# Altium PCB PCB1.PcbDoc
Units mil, origin at the board's own origin, x right, y up, seen from the top; angles counter-clockwise.
Board outline 1050 x 1650 mil, 2 copper layers (Top Layer, Bottom Layer); 30 components, 74 nets, 217 pads, 0 vias.
Unrouted connection lines stored in the file: 127.
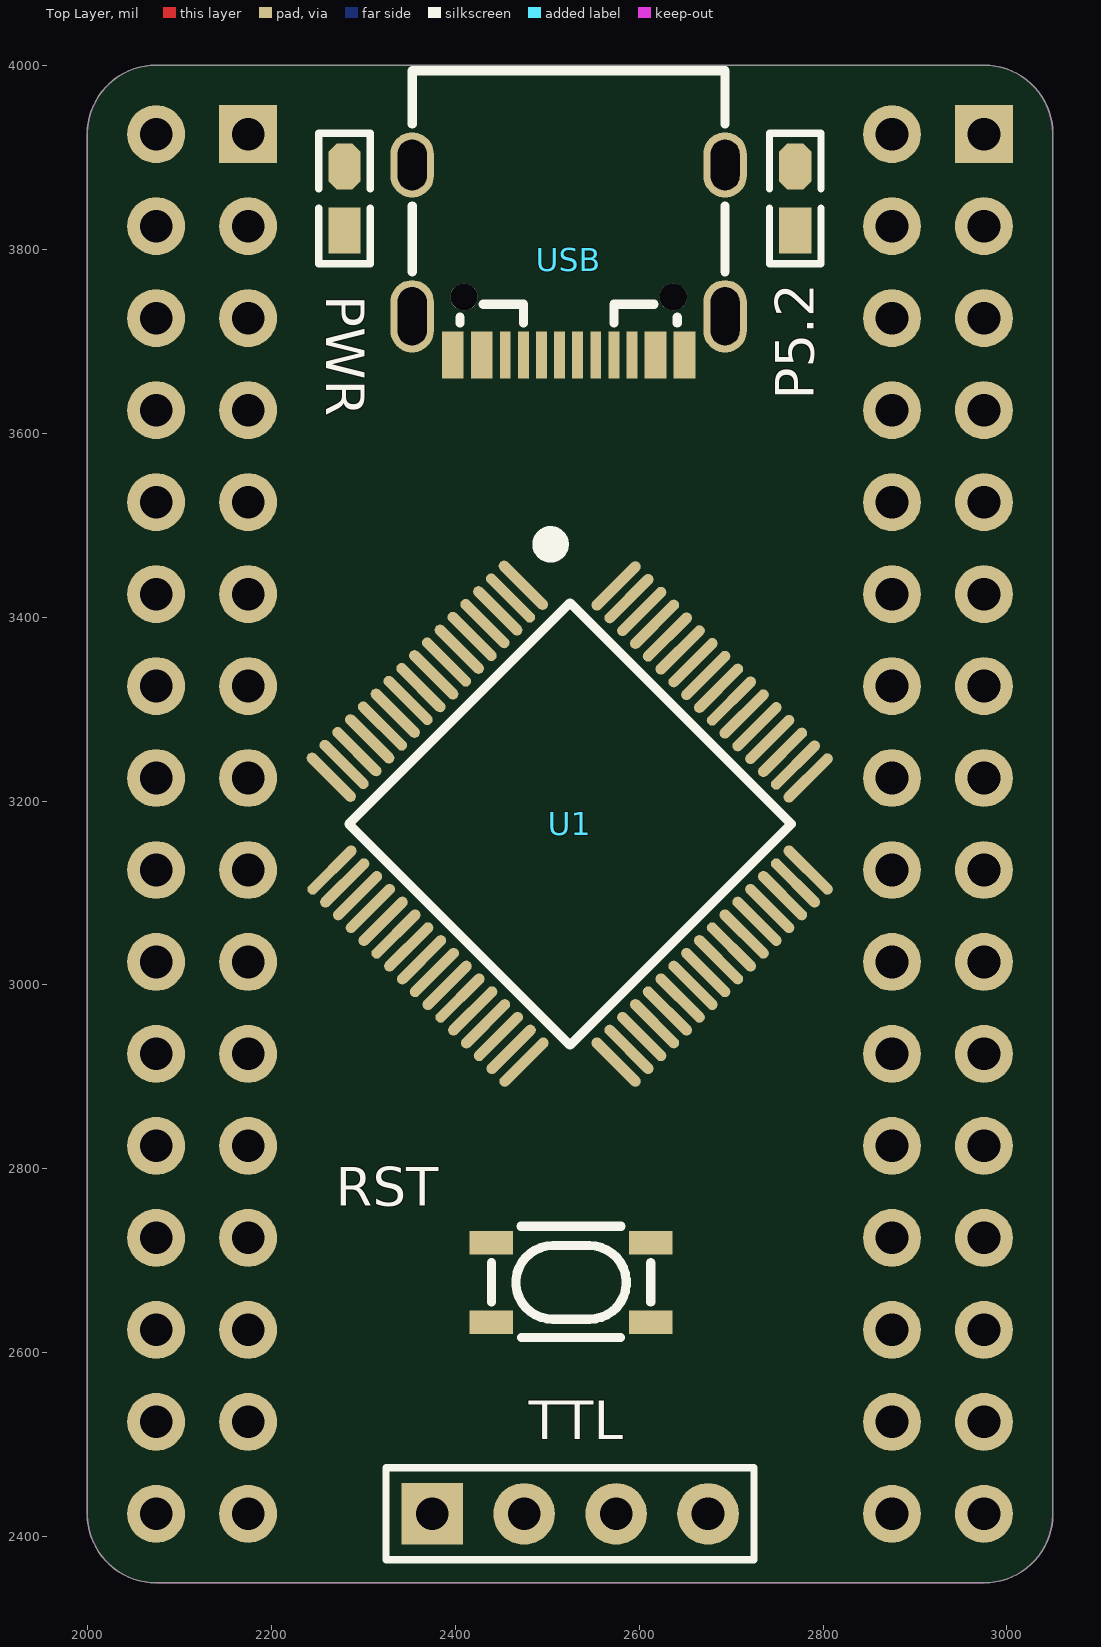
[diagram p0: Top Layer view]
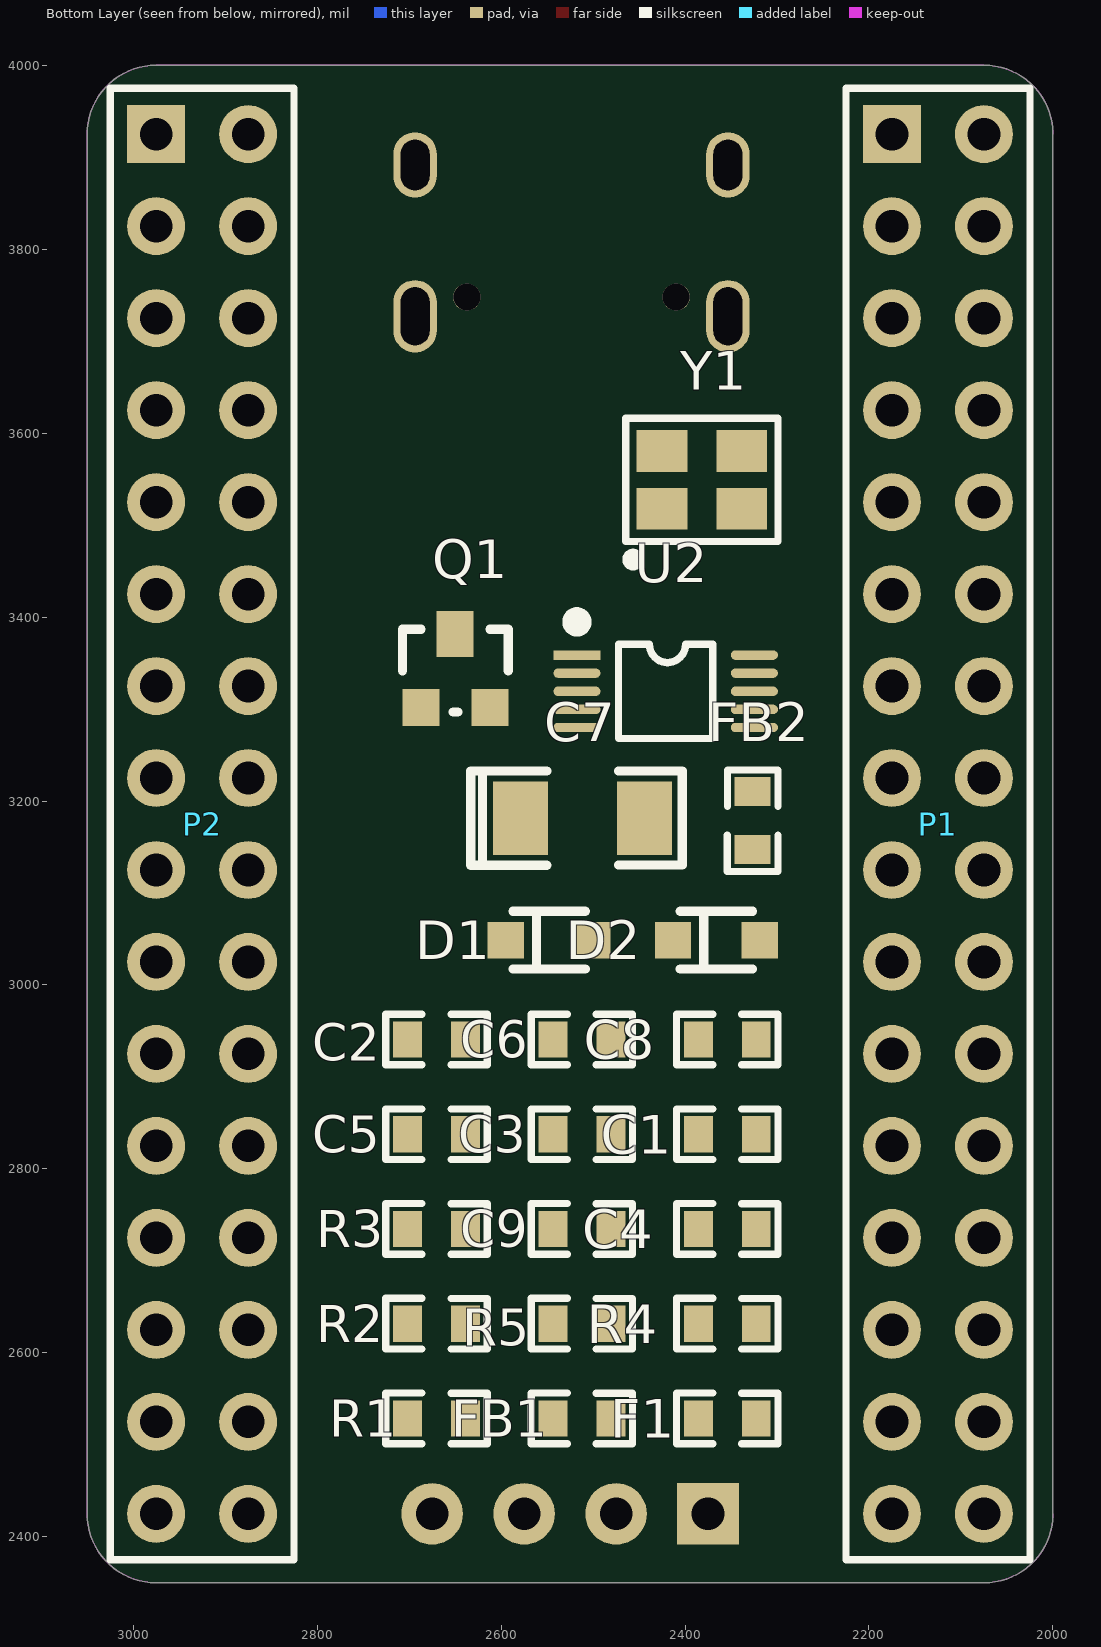
[diagram p1: Bottom Layer view, seen from below]

## Layer stack, top to bottom
Top Solder: solder mask 0.4, Solder Resist, Dk 3.5
Top Layer: signal copper 1.4
Dielectric 1: dielectric 12.6, FR-4, Dk 4.8
Bottom Layer: signal copper 1.4
Bottom Solder: solder mask 0.4, Solder Resist, Dk 3.5

## Board outline
2000,2425 2000,3925 cw(c2075,3925) 2075,4000 2975,4000 cw(c2975,3925) 3050,3925 3050,2425 cw(c2975,2425) 2975,2350 2075,2350 cw(c2075,2425)

## Design rules (kind name [scope] priority, off if disabled: settings)
Clearance [All] p1: gap=10 ignorepadtopadclearanceinfootprint=FALSE except(0: Arc-Hole Track-Hole SMDPad-Hole THPad-Hole Via-Hole Fill-Hole Poly-Hole Region-Hole Text-Hole)
ComponentClearance [All] p1: gap=20 collisioncheckmode=3 verticalgap=10 showdistances=FALSE
ComponentOrientations [All] p1: allowedrotations=27
PolygonConnect [All] p1: connectstyle=Relief reliefconductorwidth=10 reliefentries=4 polygonreliefangle="90 Angle" airgapwidth=10
RoomDefinition Sheet1 [InComponentClass('Sheet1')] p1: confinementstyle=ConfineIn formatcopy=TRUE lockcomponents=FALSE outline 0,0 2000,0 2000,1000 0,1000
RoutingVias [All] p1: holewidth=28 width=50 viastyle="Through Hole" minholewidth=28 minwidth=50 maxholewidth=28 maxwidth=50
SolderMaskExpansion [All] p1: expansion=4
Width [All] p1: maxlimit=10 minlimit=10 preferedwidth=10
29 further rules are at their usual default settings.

## Components (designator, comment, footprint, x,y, rotation, side; value= is the part's Value field where it differs from the comment)
C1 "100nF" 0603电容 2354.06,2837.71 r180 bottom
C2 "22pF" 0603电容 2670.28,2940.7 r180 bottom
C3 "22pF" 0603电容 2512.17,2837.71 r180 bottom
C4 "100nF" 0603电容 2354.06,2734.72 r180 bottom
C5 "10nF" 0603电容 2670.28,2837.71 r180 bottom
C6 "10nF" 0603电容 2512.17,2940.7 r180 bottom
C7 "16V   10uF" Tan1206 2449.03,2901.15 r180 bottom
C8 "22nF" 0603电容 2354.06,2940.7 r180 bottom
C9 "100nF" 0603电容 2512.17,2734.72 r180 bottom
D1 "1N5819" SOD-323 2517.12,2989.64 r180 bottom
D2 "5V稳压管" SOD-323 2335.26,2989.64 r180 bottom
F1 "350mA" 0603保险丝 2354.06,2528.74 r180 bottom
FB1 "0R" 0603磁珠 2512.17,2528.74 r180 bottom
FB2 "0R" 0603磁珠 2326.5,3178.6 r90 bottom
P1 "Header 16X2" HDR-16X2 2175,3925 r270 bottom locked
P2 "Header 16X2" HDR-16X2 2975,3925 r270 bottom locked
P5.2 "Blue_LED" "LED 0603B" 2770,3855 r90 top
PWR "Red_LED" "LED 0603R" 2280,3855 r90 top
Q1 "AO3401" SOT-23 2691.98,3301.02 r180 bottom
R1 "0R" 0603电阻 2670.28,2528.74 r180 bottom
R2 "10K" 0603电阻 2670.28,2631.73 r180 bottom
R3 "300R" 0603电阻 2670.28,2734.72 r180 bottom
R4 "4.7K" 0603电阻 2354.06,2631.73 r180 bottom
R5 "4.7K" 0603电阻 2512.17,2631.73 r180 bottom
RST "*" SWD 2525,2675 r180 top locked
TTL "Header 4" HDR-1X4 2375,2425 r0 top locked
U1 "STC8A8K64S4A12_LQFP64" LQFP64-10*10 2525,3175 r225 top locked
U2 "CH340E" MSOP-10 2421.05,3319.28 r270 bottom
USB "USB_TypeC" USB3.1 2510,3794 r180 top locked
Y1 "24MHz" XTAL-SMD3225 2382.45,3549.51 r180 bottom

## Footprints (in the part's own frame and the unit in brackets; to place one, negate y for a bottom-side part, rotate by r counter-clockwise, add the part's x,y. Pads: shape width x height; smd on the part's side, far side on the other; paste and mask are expansions set on the pad)
0603保险丝 [mm]
  rect 0.8x1 smd: 1(-0.8,0) 2(0.8,0)
  silkscreen extent -1.4,-0.7 1.4,0.7, body extent -0.8,-0.41 0.8,0.41, height 0.52
0603电容 [mm]
  rect 0.8x1 smd: 1(-0.8,0) 2(0.8,0)
  silkscreen extent -1.4,-0.7 1.4,0.7, body extent -0.8,-0.4 0.8,0.4, height 0.6
0603电阻 [mm]
  rect 0.8x1 smd: 1(-0.8,0) 2(0.8,0)
  silkscreen extent -1.4,-0.7 1.4,0.7, body extent -0.8,-0.4 0.8,0.4, height 0.45
0603磁珠 [mm]
  rect 0.8x1 smd: 1(-0.8,0) 2(0.8,0)
  silkscreen extent -1.4,-0.7 1.4,0.7, body extent -0.8,-0.4 0.8,0.4, height 0.8
HDR-1X4 [mm] "排针，4脚"
  rect 1.7x1.7 hole 0.9: 1(0,0)
  round 1.7 hole 0.9: 2(2.54,0) 3(5.08,0) 4(7.62,0)
  silkscreen extent -1.27,-1.27 8.89,1.27, body extent -1.27,-1.27 8.89,1.27, height 8.5
HDR-16X2 [mm] "双排排针，16x2脚"
  rect 1.6x1.6 hole 0.9: 1(0,0)
  round 1.6 hole 0.9: 2(0,2.54) 3(2.54,0) 4(2.54,2.54) 5(5.08,0) 6(5.08,2.54) 7(7.62,0) 8(7.62,2.54) 9(10.16,0) 10(10.16,2.54) 11(12.7,0) 12(12.7,2.54) 13(15.24,0) 14(15.24,2.54) 15(17.78,0) 16(17.78,2.54) 17(20.32,0) 18(20.32,2.54) 19(22.86,0) 20(22.86,2.54) 21(25.4,0) 22(25.4,2.54) 23(27.94,0) 24(27.94,2.54) 25(30.48,0) 26(30.48,2.54) 27(33.02,0) 28(33.02,2.54) 29(35.56,0) 30(35.56,2.54) 31(38.1,0) 32(38.1,2.54)
  silkscreen extent -1.27,-1.27 39.37,3.81, body extent -1.27,-1.27 39.37,3.81, height 8.5
"LED 0603B" [mil] "蓝色0603LED"
  rect 50x35 smd: 1(-35,0.26)
  oct 50x35 smd: 2(35,0.26)
  silkscreen extent -71,-28 71,28, body extent -31,-16 31,16, height 24
"LED 0603R" [mil] "红色0603LED"
  rect 50x35 smd: 1(-35,0.26)
  oct 50x35 smd: 2(35,0.26)
  silkscreen extent -71,-28 71,28, body extent -31,-16 31,16, height 24
LQFP64-10*10 [mm] "10x10mm，0.5mm"
  oval 0.3x1.8 smd: 1(-3.75,-5.575) 2(-3.25,-5.575) 3(-2.75,-5.575) 4(-2.25,-5.575) 5(-1.75,-5.575) 6(-1.25,-5.575) 7(-0.75,-5.575) 8(-0.25,-5.575) 9(0.25,-5.575) 10(0.75,-5.575) 11(1.25,-5.575) 12(1.75,-5.575) 13(2.25,-5.575) 14(2.75,-5.575) 15(3.25,-5.575) 16(3.75,-5.575) 33(3.75,5.55) 34(3.25,5.55) 35(2.75,5.55) 36(2.25,5.55) 37(1.75,5.55) 38(1.25,5.55) 39(0.75,5.55) 40(0.25,5.55) 41(-0.25,5.55) 42(-0.75,5.55) 43(-1.25,5.55) 44(-1.75,5.55) 45(-2.25,5.55) 46(-2.75,5.55) 47(-3.25,5.55) 48(-3.75,5.55)
  oval 1.8x0.3 smd: 17(5.55,-3.75) 18(5.55,-3.25) 19(5.55,-2.75) 20(5.55,-2.25) 21(5.55,-1.75) 22(5.55,-1.25) 23(5.55,-0.75) 24(5.55,-0.25) 25(5.55,0.25) 26(5.55,0.75) 27(5.55,1.25) 28(5.55,1.75) 29(5.55,2.25) 30(5.55,2.75) 31(5.55,3.25) 32(5.55,3.75) 49(-5.55,3.75) 50(-5.55,3.25) 51(-5.55,2.75) 52(-5.55,2.25) 53(-5.55,1.75) 54(-5.55,1.25) 55(-5.55,0.75) 56(-5.55,0.25) 57(-5.55,-0.25) 58(-5.55,-0.75) 59(-5.55,-1.25) 60(-5.55,-1.75) 61(-5.55,-2.25) 62(-5.55,-2.75) 63(-5.55,-3.25) 64(-5.55,-3.75)
  silkscreen extent -5.33,-6.09 4.32,4.32, body extent -6,-6 6,6, height 1.45
MSOP-10 [mm] "塑封体长3mm，宽3mm，脚距0.5"
  rect 0.26x1.3 smd: 1(-1,-2.45)
  oval 0.26x1.3 smd: 2(-0.5,-2.45) 3(0,-2.45) 4(0.5,-2.45) 5(1,-2.45) 6(1,2.45) 7(0.5,2.45) 8(0,2.45) 9(-0.5,2.45) 10(-1,2.45)
  silkscreen extent -2.07,-2.6 1.3,1.3, body extent -1.5,-2.45 1.5,2.45, height 0.95
SOD-323 [mm] "1.8x1.3X0.9mm（长宽高，不包括引脚）"
  rect 1x1 smd: 1(-1.979,1.5) 2(0.421,1.5)
  silkscreen extent -1.78,0.7 0.22,2.3, body extent -2.1,0.83 0.54,2.13, height 0.95
SOT-23 [mil]
  rect 40x40 smd: 1(4.88,0.63) 2(79.88,0.63)
  rect 40x50 smd: 3(41.88,80.63)
  silkscreen extent -15,-4 100,86, body extent -15,-11 99,99, height 47
SWD [mm] "轻触开关3*4*2.5"
  rect 1.2x0.65 smd: 1(-2.229,1.059) 2(-2.229,-1.141) 3(2.171,1.059) 4(2.171,-1.141)
  silkscreen extent -2.23,-1.59 2.17,1.48
Tan1206 [mil]
  rect 60x80 smd: 1(-130,280) 2(5,280)
  silkscreen extent -184,229 46,332, body extent -125,249 1,312, height 63
USB3.1 [mm]
  rect 0.3x1.3 smd: 1(-3.691,2.77) 1(-3.391,2.77) 2(-2.891,2.77) 2(-2.591,2.77) 3(0.909,2.771) 4(-1.591,2.77) 5(-1.091,2.77) 6(-0.591,2.77) 7(-0.091,2.77) 8(0.409,2.77) 9(-2.091,2.771) 10(1.409,2.77) 11(1.909,2.77) 11(2.209,2.77) 12(2.709,2.77) 12(3.009,2.77)
  oval 1.2x1.8 hole 0.8 slot 1.4 at 90 deg: 13(-4.661,-2.477) 13(3.979,-2.477)
  oval 1.2x2 hole 0.8 slot 1.6 at 90 deg: 13(-4.661,1.703) 13(3.979,1.703)
  round 0.75 hole 0.75 unplated: ""(-3.231,1.173) ""(2.549,1.173)
  silkscreen extent -4.66,-5.08 3.98,1.89, body extent -4.81,-5.14 4.13,2.76, height 3.2
XTAL-SMD3225 [mm]
  rect 1.4x1.15 smd: 1(-1.08,-0.811) 2(1.12,-0.811) 3(1.12,0.789) 4(-1.08,0.789)
  silkscreen extent -2.08,-2.36 2.12,1.69, body extent -1.59,-1.24 1.61,1.26, height 1.05

## Part data
C1 C2 C3 C4 C5 C6 C8 C9: library part Capacitor, "电容", BOM名称=无极性贴片电容, 学习资源=www.ooocke.com, 版权归属=源创客
C7: library part T_Capacitor, "贴片钽电容", BOM名称=贴片钽电容, 学习资源=www.ooocke.com, 版权归属=源创客
F1: library part Fuse, "Fuse"
FB1 FB2: library part FERRITE_BEAD, "磁珠"
P1 P2: "16*2P接插件", BOM名称=16*2P接插件, 学习资源=www.ooocke.com, 版权归属=源创客
R1 R2 R3 R4 R5: library part Resistor, "电阻", BOM名称=贴片电阻, 学习资源=www.ooocke.com, 版权归属=源创客
RST: library part SW_TB, "轻触开关"
TTL: "4P接插件", BOM名称=4P接插件, 学习资源=www.ooocke.com, 版权归属=源创客
USB: library part USB3.1, "TypeC接口"
Y1: library part Crystal, "晶振", BOM名称=2脚晶振, 学习资源=www.ooocke.com, 版权归属=源创客
Q1: BOM名称=P沟道场效应管, 学习资源=www.ooocke.com, 版权归属=源创客

## Nets (pads, with @x,y where several pads share a name; then routed paths per layer and width w, separated by ;. In a path a pad name is that pad's centre, name@x,y a point inside that pad or via, vN(x,y) a via of type N, cw(c..) or ccw(c..) an arc to the next point about the centre after c; other vN are vias at no path point)
340_Rx: R3.1 U2.9
340_Tx: D1.1 U2.8
AGND: C1.2 C4.1 FB1.2 U1.15
AVCC: C4.2 FB2.2 R1.1 U1.17
AVREF: C1.1 R1.2 U1.16
GND: C2.2 C3.2 C5.2 C6.2 C7.2 C8.1 C9.1 D2.2 FB1.1 P1.2 P1.4 P2.1 PWR.2 R2.1 TTL.2 U1.21 U2.3 USB.1 USB.12 USB.13
NetC9_2: C9.2 U2.10
NetF1_1: F1.1 P1.1 P2.2 USB.2 USB.11
NetP5.2_1: P5.2.1 R5.2
NetPWR_1: PWR.1 R4.2
NetQ1_1: Q1.1 R2.2 RST.2
NetU2_1: U2.1 USB.6 USB.8
NetU2_2: U2.2 USB.5 USB.7
P0.0: P2.15 U1.51
P0.1: P2.16 U1.52
P0.2: P2.13 U1.53
P0.3: P2.7 U1.59
P0.4: P2.8 U1.60
P0.5: P2.5 U1.61
P0.6: P2.6 U1.62
P0.7: P2.3 U1.63
P1.0: P2.4 U1.64
P1.1: P1.6 U1.3
P1.2: P1.7 U1.4
P1.3: P1.8 U1.5
P1.4: P1.13 U1.10
P1.5: P1.15 U1.12
P1.6: C3.1 P1.16 U1.13 Y1.1
P1.7: C2.1 P1.17 U1.14 Y1.3
P2.0: P2.26 U1.42
P2.1: P2.24 U1.44
P2.2: P2.21 U1.45
P2.3: P2.22 U1.46
P2.4: P2.19 U1.47
P2.5: P2.20 U1.48
P2.6: P2.17 U1.49
P2.7: P2.18 U1.50
P3.0: D1.2 P1.25 TTL.4 U1.27
P3.1: P1.26 R3.2 TTL.3 U1.28
P3.2: P1.27 U1.29
P3.3: P1.28 U1.30
P3.4: P1.29 U1.31
P3.5: P1.30 U1.32
P3.6: P2.31 U1.35
P3.7: P2.32 U1.36
P4.0: P1.20 U1.22
P4.1: P2.29 U1.37
P4.2: P2.23 U1.43
P4.3: P2.10 U1.58
P4.4: P1.14 U1.11
P5.0: P1.31 U1.33
P5.1: P1.32 U1.34
P5.2: P1.3 P5.2.2 U1.1
P5.3: P1.5 U1.2
P5.4: P1.18 U1.18
P5.5: P1.19 U1.20
P6.0: P1.9 U1.6
P6.1: P1.10 U1.7
P6.2: P1.11 U1.8
P6.3: P1.12 U1.9
P6.4: P1.21 U1.23
P6.5: P1.22 U1.24
P6.6: P1.23 U1.25
P6.7: P1.24 U1.26
P7.0: P2.30 U1.38
P7.1: P2.27 U1.39
P7.2: P2.28 U1.40
P7.3: P2.25 U1.41
P7.4: P2.14 U1.54
P7.5: P2.11 U1.55
P7.6: P2.12 U1.56
P7.7: P2.9 U1.57
VCC: C5.1 C6.1 C7.1 D2.1 FB2.1 Q1.2 R4.1 R5.1 U1.19
VCCIN: C8.2 F1.2 Q1.3 RST.1 TTL.1 U2.7
pads on no net: RST.3 RST.4 U2.4 U2.5 U2.6 USB. USB.3 USB.4 USB.9 USB.10 Y1.2 Y1.4

## Keep-outs
Keep-Out Layer:
  the board outline again, w0

## Silkscreen, mask and mechanical layers (free items; w line width, h text height)
Top Overlay:
Mechanical 1:
  lines w0: 2000,2425 ccw(c2075,2425) 2075,2350 2975,2350 ccw(c2975,2425) 3050,2425 3050,3925 ccw(c2975,3925) 2975,4000 2075,4000 ccw(c2075,3925) 2000,3925 2000,2425
  lines w10: 5985,1370 5990,1375